# EAGLE board RH002.1 (EAGLE 7.1.0)
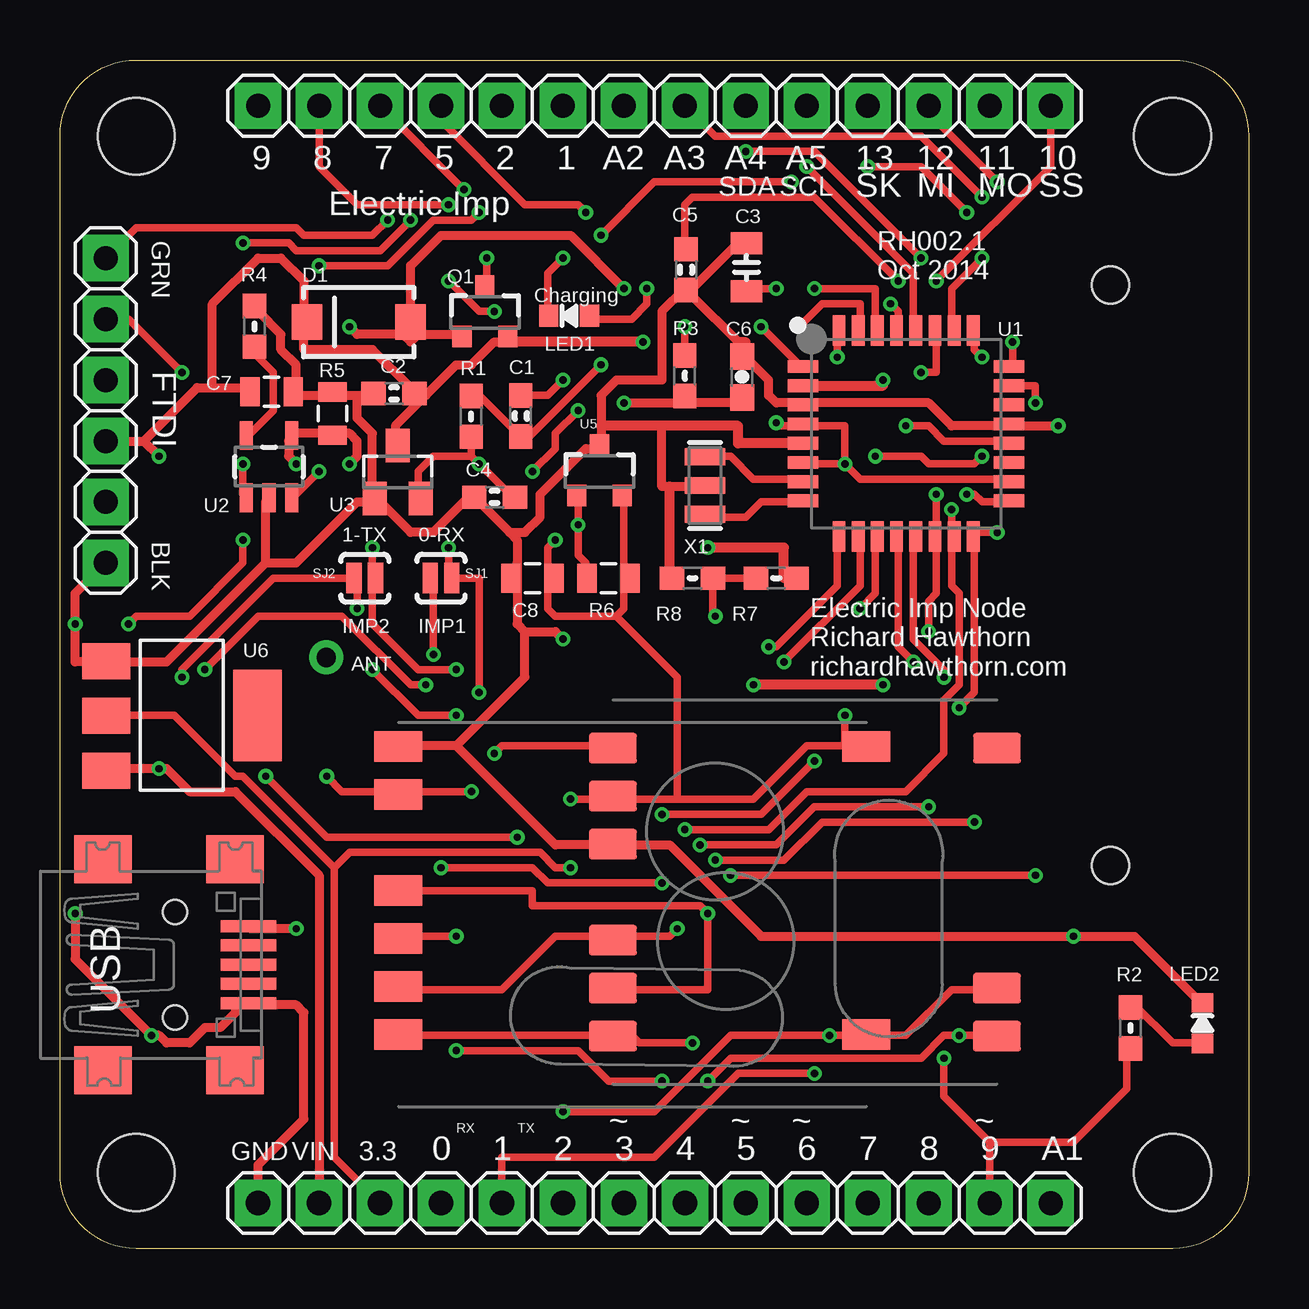
[diagram p0: board, top side]
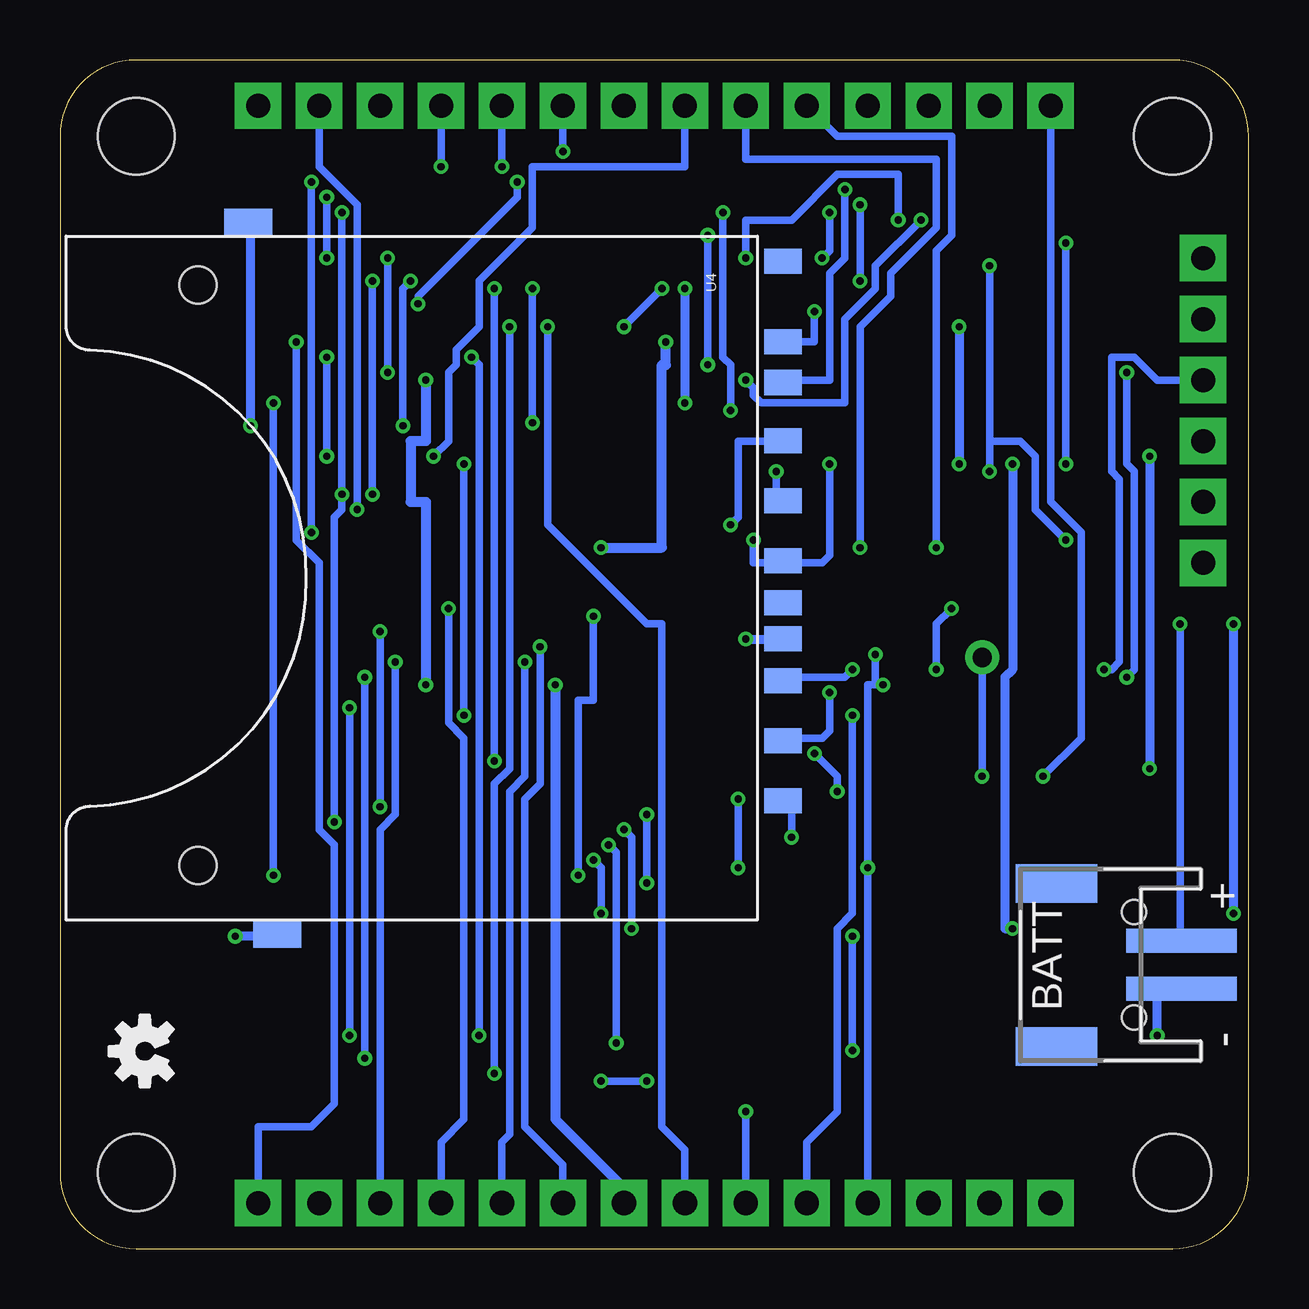
[diagram p1: board, bottom side, seen from below]

Size 49.53 x 49.53 mm. Coordinates in mm from the lower left corner, seen from the top.
Outline: 0,3.17 0,46.35 arc-90 3.17,49.53 46.35,49.53 arc-90 49.53,46.35 49.53,3.17 arc-90 46.35,0 3.17,0 arc-90 0,3.17
Copper layers (1*16): Top 0.035mm / dielectric 1.5mm / Bottom 0.035mm
Design rules "ITEADstudio_DRC *": minimum track width 12mil, minimum drill 12mil, track to track 6mil, track to pad 6mil, pad to pad 6mil, via to via 6mil, smd to smd 0mil, copper to edge 10mil, drill to drill 10mil, minimum pad ring 10mil, minimum via ring 6mil, stop-mask expansion 2mil, vias tented up to drill 100mil, thermal gap 15mil
Net classes: 1 power: width 0.381 mm, clearance 0.254 mm
Holes 3.2 mm at 3.17,3.17 3.17,46.35 46.35,46.35 46.35,3.17
tKeepout: area 0,0 to 5.7,5.7; area 43.8,0 to 49.5,5.7; area 43.8,43.8 to 49.5,49.5; area 0,43.8 to 5.7,49.5; area 42.5,13.3 to 49.5,42.5
bKeepout: area 0,43.8 to 5.7,49.5; area 43.8,43.8 to 49.5,49.5; area 43.8,0 to 49.5,5.7; area 0,0 to 5.7,5.7; area 42.5,13.3 to 49.5,42.5
tRestrict: area 24.3,8.9 to 29.1,12.8; area 5.8,16.9 to 6.9,18.5; area 5.2,9.7 to 6.7,10.4
bRestrict: area 27.4,17.7 to 29.2,18.7; area 21.1,13.8 to 22.9,14.9; area 21.6,12.6 to 22.1,13.2; area 20.7,12.6 to 21.2,13.2; area 20.2,12.8 to 20.7,13.5; area 20.1,13.4 to 20.6,14; area 26.5,18.9 to 27.1,19.5; area 26.5,17.9 to 27.1,18.5; area 27.5,19.1 to 28,19.8; area 27.9,18.8 to 29.1,19.6

## Footprints (pad centres in the part's own frame; a part is rotated, then mirrored left to right if it is on the bottom)
0603-CAP = smd 1.016 x 0.965: 1 -0.85,0; 2 0.85,0
0805-CAP = smd 0.902 x 1.3: 1 -1,0; 2 1,0
0603-CAP' = smd 1.1 x 1: 1 -0.85,0; 2 0.85,0
0805 = smd 0.8 x 1.2: 1 -0.9,0; 2 0.9,0
USB-MINIB = smd 0.5 x 2.308: D+ 0,4.064; D- -0.8,4.064; GND 1.6,4.064; ID 0.8,4.064; VBUS -1.6,4.064 | smd 2 x 2.4: GND1 -4.4,-2; GND2 -4.4,3.5; GND3 4.4,3.5; GND4 4.4,-2 | hole 1: -2.2,1; 2.2,1
JST-PH-2-SMT-RA = smd 1 x 4.6: 1 1,-3.7; 2 -1,-3.7 | smd 1.6 x 3.4: NC1 -3.4,1.5; NC2 3.4,1.5
1X06 = drill 1 pad 1.93 square: 1 -6.35,0; 2 -3.81,0; 3 -1.27,0; 4 1.27,0; 5 3.81,0; 6 6.35,0
SMA-DIODE = smd 1.27 x 1.47: A -2.15,0; C 2.15,0
1X14 = drill 1 pad 1.93 square: 1 -16.51,0; 2 -13.97,0; 3 -11.43,0 | drill 1.016 pad 1.93 square: 4 -8.89,0; 5 -6.35,0; 6 -3.81,0; 7 -1.27,0; 8 1.27,0; 9 3.81,0; 10 6.35,0; 11 8.89,0; 12 11.43,0; 13 13.97,0; 14 16.51,0
1X08 = drill 1 pad 1.93 square: 1 -8.89,0; 2 -6.35,0; 3 -3.81,0; 4 -1.27,0; 5 1.27,0; 6 3.81,0; 7 6.35,0; 8 8.89,0
0603-LED = smd 0.8 x 0.9: MINUS -0.85,0; PLUS 0.85,0
SOT23-3 = smd 0.8 x 0.9: 1 -0.95,-1; 2 0.95,-1; 3 0,1.1
0603-RES = smd 1.016 x 0.965: 1 -0.85,0; 2 0.85,0
RFM12B-MINPADS = smd 2 x 1.27: ANT 8,-6; GND 8,-2; IRQ -8,4; SCK 8,4; SDI 8,2; SDI1 -8.002,-6.001; SDO -8,6; SEL 8,6; VDD 8,-4
RFM69W-MINPADS = smd 2 x 1.27: ANA 8,-5; DIO0 -11.5,5; GND 8,-7; MISO 8,1; MOSI 8,3; NSS 8,5; SCK 8,-1; VDD -11.5,-7
PAD-JUMPER-2-NO_YES_SILK = smd 0.635 x 1.27: 1 -0.45,0; 2 0.45,0
TQFP32-08 = smd 1.27 x 0.533: 1 -4.293,2.8; 2 -4.293,2; 3 -4.293,1.2; 4 -4.293,0.4; 5 -4.293,-0.4; 6 -4.293,-1.2; 7 -4.293,-2; 8 -4.293,-2.8; 17 4.293,-2.8; 18 4.293,-2; 19 4.293,-1.2; 20 4.293,-0.4; 21 4.293,0.4; 22 4.293,1.2; 23 4.293,2; 24 4.293,2.8 | smd 0.533 x 1.27: 9 -2.8,-4.293; 10 -2,-4.293; 11 -1.2,-4.293; 12 -0.4,-4.293; 13 0.4,-4.293; 14 1.2,-4.293; 15 2,-4.293; 16 2.8,-4.293; 25 2.8,4.293; 26 2,4.293; 27 1.2,4.293; 28 0.4,4.293; 29 -0.4,4.293; 30 -1.2,4.293; 31 -2,4.293; 32 -2.8,4.293
SOT23-5 = smd 0.55 x 1.2: 1 -0.95,-1.3; 2 0,-1.3; 3 0.95,-1.3; 4 0.95,1.3; 5 -0.95,1.3
SOT23 = smd 1 x 1.4: 1 -0.95,-1.1; 2 0.95,-1.1; 3 0,1.1
SD_MMC_SOCKET = smd 1.05 x 1.56: 1 6.77,29.87; 2 4.27,29.87; 3 2.52,29.87; 4 -0.73,29.87; 5 -3.23,29.87; 6 -5.73,29.87; 7 -8.15,29.87; 8 -9.85,29.87; 9 9.27,29.87; CD 1.02,29.87; WP -13.2,29.87 | smd 1.2 x 2: S1 -14.8,7.6; S2 14.8,8.8 | hole 1.55: 11.98,5.5; -12.22,5.5
SOT223 = smd 1.499 x 2.007: 1 -2.261,-3.15; 2 0.025,-3.15; 3 2.311,-3.15 | smd 3.81 x 2.007: 4 0,3.15
RFM12B-ANTENNA = drill 0.8 pad 1.422: P$1 0,0
RESONATOR-SMD = smd 0.7 x 1.7: 1 -1.2,0; 2 0,0; 3 1.2,0

## Placement (x,y rotation side)
C1  0.1  [0603-CAP]  19.2,34.7 90 top
C2  1u  [0603-CAP]  13.92,35.64 180 top
C3  10u  [0805-CAP]  28.6,40.89 90 top
C4  0.1  [0603-CAP]  18.11,31.32 180 top
C5  0.1  [0603-CAP]  26.09,40.79 270 top
C6  4u7  [0603-CAP']  28.42,36.32 90 top
C7  1 uF  [0805]  8.81,35.71 0 top
C8  0.1uF  [0805]  19.68,27.94 180 top
CN1  USB  [USB-MINIB]  3.78,11.84 270 top
CN3  BATT  [JST-PH-2-SMT-RA]  6.5,11.82 90 bottom
CN4  FTDI  [1X06]  1.91,34.92 90 top
D1  SCHOTTKY  [SMA-DIODE]  12.45,38.61 180 top
JP1  [1X06]  14.61,47.62 0 top
JP3  [1X14]  24.77,1.91 180 top
JP5  [1X08]  32.38,47.62 0 top
LED1  LED0603  [0603-LED]  21.21,38.87 0 top
LED2  LED0603  [0603-LED]  47.6,9.4 270 top
Q1  MOSFET  [SOT23-3]  17.7,39.01 0 top
R1  10k  [0603-RES]  17.13,34.68 90 top
R2  1k5  [0603-RES]  44.6,9.19 270 top
R3  1k5  [0603-RES]  26.04,36.37 90 top
R4  2K  [0603-RES]  8.1,38.43 270 top
R5  100 K  [0805]  11.35,34.8 270 top
R6  100k  [0805]  22.86,27.94 0 top
R7  470k  [0603-RES]  29.84,27.94 0 top
R8  470k  [0603-RES]  26.35,27.94 0 top
RF1  RFM12B  [RFM12B-MINPADS]  31.04,14.86 180 top
RF2  RFM69  [RFM69W-MINPADS]  22.1,13.92 180 top
SJ1  JUMPER-PAD-2-NOYES_SILK  [PAD-JUMPER-2-NO_YES_SILK]  15.88,27.94 0 top
SJ2  JUMPER-PAD-2-NOYES_SILK  [PAD-JUMPER-2-NO_YES_SILK]  12.7,27.94 0 top
U1  ATMega-328  [TQFP32-08]  35.26,33.96 0 top
U2  MCP73831  [SOT23-5]  8.71,32.59 0 top
U3  MCP1703CB  [SOT23]  14.07,32.36 0 top
U4  ELECTRIC_IMP  [SD_MMC_SOCKET]  49.28,27.94 270 bottom
U5  ATSHA204-TSU  [SOT23-3]  22.48,32.38 0 top
U6  REG1117  [SOT223]  5.08,22.23 270 top
U$1  RFM12B_ANTENNA  [RFM12B-ANTENNA]  11.1,24.64 0 top
U$3  [OSHW-LOGO-S]  46,8.23 90 bottom
X1  16 MHz  [RESONATOR-SMD]  26.87,31.8 270 top

## Library data of the parts
C1-C5 CN1 LED1 LED2 R1-R4 R7 R8 RF1 RF2 U1 U$1 = LowPowerLab
C6 U2 X1 = SparkFun
C7 = SparkFun-Capacitors
C8 R6 SJ1 SJ2 = SparkFun-Passives
CN3 = adafruit
CN4 JP1 JP3 JP5 = pinhead
D1 Q1 = SparkFun-DiscreteSemi
R5 = SparkFun-Resistors
U3 = linear
U4 = SparkFun-RF
U5 = SparkFun-DigitalIC
U6 = burr-brown; MPN: REG1117; OC_FARNELL: 1097566; OC_NEWARK: 14P6981
U$3 = SparkFun-Aesthetics

## Nets
A0: R7.1 R8.2 U1.23
A1: JP3.1 U1.24
A2: JP5.1 U1.25
A3: JP5.2 U1.26
A4_SDA: JP5.3 U1.27
A5_SCL: JP5.4 U1.28
A6: U1.19
A7: U1.22
AREF: C5.1 U1.20
CD: U4.CD
D0_RX: CN4.4 JP3.11 SJ1.1 U1.30
D1_TX: CN4.5 JP3.10 SJ2.1 U1.31
D2: JP3.9 RF1.IRQ RF2.DIO0 U1.32
D3: JP3.8 U1.1
D4: JP3.7 U1.2
D5: JP3.6 U1.9
D6: JP3.5 U1.10
D7: JP3.4 U1.11
D8: JP3.3 U1.12
D9: JP3.2 R2.2 U1.13
D10_SS: JP5.8 RF1.SEL RF2.NSS U1.14
D11_MOSI: JP5.7 RF1.SDI RF2.MOSI U1.15
D12_MISO: JP5.6 RF1.SDO RF2.MISO U1.16
D13_SCK: JP5.5 RF1.SCK RF2.SCK U1.17
GND [power]: C2.2 C3.2 C4.2 C5.2 C6.2 C7.2 C8.2 CN1.GND CN3.2 CN4.1 JP3.14 LED2.MINUS R4.1 R5.1 R8.1 RF1.GND RF2.GND U1.3 U1.5 U1.21 U2.2 U3.1 U4.3 U4.S1 U4.S2 U5.3 U6.1 X1.2
ID: R6.1 U4.6 U5.1
N$1: U1.7 X1.1
N$2: LED2.PLUS R2.1
N$3: RF1.ANT RF2.ANA U$1.P$1
N$4: LED1.PLUS R3.2
N$20: C1.2 CN4.6
N$21: U1.8 X1.3
PIN1: JP1.6 SJ1.2 U4.1
PIN2: JP1.5 SJ2.2 U4.2
PIN5: JP1.4 U4.5
PIN7: JP1.3 U4.7
PIN8: JP1.2 U4.8
PIN9: JP1.1 U4.9
PROG: R4.2 U2.5
PWR [power]: C2.1 C7.1 CN4.3 D1.C JP3.13 Q1.2 R7.2 U3.3 U6.3
RST: C1.1 R1.2 U1.29
STAT: LED1.MINUS U2.1
VBAT: CN3.1 Q1.3 U2.3
VBUS [power]: C6.1 CN1.VBUS D1.A Q1.1 R3.1 R5.2 U2.4
VCC: C3.1 C4.1 C8.1 JP3.12 R1.1 R6.2 RF1.VDD RF2.VDD U1.4 U1.6 U1.18 U3.2 U4.4 U5.2 U6.2

## Tracks (layer width: path | path; a pad name or v marks a point on that pad's centre or on a via)
A0  (via drill 0.3)
  Top 0.305: R7.1 R8.2 27.2,26.35 v27.3,26.35 | U1.23 40.64,35.96 v40.64,35.24 | v40.64,15.56 v27.94,15.56
  Bottom 0.305: v40.64,35.24 v40.64,15.56 | v27.94,15.56 27.94,22.86 27.3,22.86 v27.3,26.35
A1  (via drill 0.3)
  Top 0.305: v39.69,37.78 39.69,36.83 U1.24
  Bottom 0.305: v39.69,37.78 39.69,29.53 38.73,28.57 38.73,17.46 38.1,16.83 38.1,6.03 39.05,5.08 41.27,5.08 JP3.1
A2  (via drill 0.3)
  Top 0.305: v38.42,37.15 38.1,37.47 38.1,38.1 U1.25 | v38.42,33.02 38.1,32.7 36.2,32.7 35.88,33.02 v33.97,33.02
  Bottom 0.305: v38.42,33.02 v38.42,37.15 | v33.97,33.02 33.34,33.66 33.34,36.51 33.02,36.83 33.02,37.47 32.07,38.42 32.07,40.32 29.84,42.55 29.84,45.09 23.5,45.09 JP5.1
A3  (via drill 0.3)
  Top 0.305: v38.42,41.27 37.15,40.01 37.15,38.42 U1.26 | v38.42,43.81 35.88,46.35 27.3,46.35 JP5.2
  Bottom 0.305: v38.42,43.81 v38.42,41.27
A4_SDA  (via drill 0.3)
  Top 0.305: v35.88,36.51 36.51,36.51 36.51,38.1 U1.27 | v35.88,41.27 31.43,45.72 v28.57,45.72
  Bottom 0.305: v35.88,41.27 v35.88,36.51 | JP5.3 v28.57,45.72
A5_SCL  (via drill 0.3)
  Top 0.305: v31.11,45.09 35.56,40.64 35.56,38.42 U1.28
  Bottom 0.305: JP5.4 v31.11,45.09
AREF  (via drill 0.3)
  Top 0.305: v34.92,40.32 31.43,43.81 26.35,43.81 26.04,43.5 26.04,41.91 C5.1 | v35.24,34.29 36.2,34.29 36.83,33.66 39.37,33.66 U1.20
  Bottom 0.305: v34.92,40.32 35.24,40.01 v35.24,34.29
D0_RX  (via drill 0.3)
  Top 0.305: v15.56,24.77 15.56,27.94 SJ1.1 | v31.43,40.01 33.97,40.01 33.97,38.42 U1.30 | v31.43,20.32 29.21,18.1 v25.08,18.1 | v25.08,15.24 20.32,15.24 19.68,15.88 v15.88,15.88 | v6.03,24.13 8.26,26.35 11.75,26.35 14.61,23.5 v15.24,23.5
  Bottom 0.305: 15.56,23.5 v15.56,24.77 | 15.56,23.5 15.88,23.5 v15.88,15.88 JP3.11 | v31.43,20.32 v31.43,40.01 | v25.08,15.24 v25.08,18.1 | CN4.4 3.81,36.2 4.76,37.15 5.71,37.15 5.71,32.38 5.4,32.07 5.4,24.45 5.71,24.13 v6.03,24.13 | 15.56,23.5 v15.24,23.5
D1_TX  (via drill 0.3)
  Top 0.305: v5.08,23.81 5.08,24.13 8.89,27.94 SJ2.1 12.38,27.94 v12.38,26.67 | v5.08,36.51 2.86,38.73 CN4.5 | v30.8,38.42 31.75,39.37 33.34,39.37 33.34,38.42 U1.31 | v31.43,7.3 28.26,7.3 24.77,3.81 18.41,3.81 JP3.10 | v13.02,24.13 14.92,22.23 v16.51,22.23
  Bottom 0.305: v5.08,23.81 4.76,24.13 4.76,32.38 5.08,32.7 v5.08,36.51 | v30.8,38.42 30.8,20 31.43,19.37 v31.43,7.3 | v12.38,26.67 13.02,26.04 v13.02,24.13 | v16.51,22.23 16.51,13.97 17.14,13.34 17.14,5.71 18.41,4.45 JP3.10
D2  (via drill 0.3)
  Top 0.305: v32.38,37.15 32.38,38.1 U1.32 | RF1.IRQ 38.73,10.79 37.15,10.79 35.24,8.89 33.66,8.89 RF2.DIO0 33.34,8.89 v32.07,8.89 27.94,8.89 24.77,5.71 v20.95,5.71
  Bottom 0.305: v32.38,37.15 32.07,36.83 v32.07,8.89 | v20.95,5.71 JP3.9
D3  (via drill 0.3)
  Top 0.305: v29.21,38.42 30.8,36.83 U1.1
  Bottom 0.305: v29.21,38.42 29.21,30.16 25.08,26.04 24.45,26.04 24.45,5.08 23.5,4.13 JP3.8
D4  (via drill 0.3)
  Top 0.406: U1.2 34.29,35.96 v34.29,36.2 | v34.29,23.5 v28.89,23.5
  Bottom 0.406: v34.29,36.2 34.29,33.66 34.92,33.66 34.92,31.11 34.29,31.11 v34.29,23.5 | v28.89,23.5 28.89,5.4 26.04,2.54 JP3.7
D5  (via drill 0.3)
  Top 0.305: v29.53,25.08 29.84,25.08 32.38,27.62 32.38,29.53 U1.9
  Bottom 0.305: v29.53,25.08 29.53,19.37 30.16,18.73 30.16,5.08 28.57,3.49 JP3.6
D6  (via drill 0.3)
  Top 0.305: v30.16,24.45 33.34,27.62 33.34,29.53 U1.10
  Bottom 0.305: v30.16,24.45 30.16,19.68 30.8,19.05 30.8,4.76 31.11,4.45 JP3.5
D7  (via drill 0.3)
  Top 0.305: v33.34,26.67 33.97,27.3 33.97,29.53 U1.11
  Bottom 0.305: v33.34,26.67 33.34,21.91 32.7,21.27 32.7,5.4 33.66,4.45 JP3.4
D8  (via drill 0.3)
  Top 0.305: v35.56,24.45 34.92,25.08 34.92,29.53 U1.12
  Bottom 0.305: v35.56,24.45 35.56,18.1 36.2,17.46 JP3.3
D9  (via drill 0.3)
  Top 0.305: 38.73,4.45 42.23,4.45 44.45,6.67 44.45,8.26 R2.2 | JP3.2 38.73,4.45 | v36.83,23.81 36.83,24.13 35.56,25.4 35.56,29.53 U1.13 | v36.83,7.94 36.83,6.35 38.73,4.45
  Bottom 0.305: v36.83,7.94 v36.83,23.81
D10_SS  (via drill 0.3)
  Top 0.305: RF2.NSS 14.29,8.89 22.86,8.89 RF1.SEL 23.18,8.89 23.81,8.89 24.13,8.57 v26.35,8.57 | v36.51,31.43 36.51,29.84 U1.14 36.51,29.53 36.51,27.3 36.2,26.99 v36.2,25.72 | v36.51,40.32 41.27,45.09 JP5.8 | v26.67,16.83 29.84,16.83 31.43,18.41 v36.2,18.41
  Bottom 0.305: v36.51,40.32 v36.51,31.43 | v26.35,8.57 26.35,16.51 v26.67,16.83 | v36.2,25.72 v36.2,18.41
D11_MOSI  (via drill 0.3)
  Top 0.305: RF2.MOSI 14.29,10.79 18.41,10.79 20.64,13.02 22.86,13.02 RF1.SDI 23.18,13.02 25.4,13.02 v25.72,13.34 | v37.15,30.8 37.15,29.84 U1.15 37.15,29.53 37.15,27.62 37.47,27.3 37.47,23.5 36.83,22.86 36.83,20.64 35.24,19.05 31.11,19.05 29.53,17.46 v26.04,17.46
  Bottom 0.305: v37.15,30.8 37.15,43.5 38.73,45.09 JP5.7 | v25.72,13.34 25.72,17.14 v26.04,17.46
D12_MISO  (via drill 0.3)
  Top 0.305: v39.05,29.84 38.1,29.84 U1.16 38.1,29.53 38.1,23.18 v37.47,22.54 | v39.05,44.45 36.2,47.31 JP5.6 | v16.51,13.02 14.29,13.02 RF2.MISO | v16.51,8.26 21.59,8.26 22.86,6.99 v25.08,6.99 | v26.99,6.99 27.94,7.94 35.88,7.94 36.83,8.89 v37.47,8.89 38.73,8.89 RF1.SDO
  Bottom 0.305: v39.05,44.45 v39.05,29.84 | v16.51,8.26 v16.51,13.02 | v26.99,6.99 v25.08,6.99 | v37.47,8.89 v37.47,22.54
D13_SCK  (via drill 0.3)
  Top 0.305: RF2.SCK 14.29,14.92 19.68,14.92 19.68,14.29 26.67,14.29 v26.99,13.97 26.99,10.79 22.86,10.79 RF1.SCK | v37.78,31.43 38.1,31.43 38.42,31.11 39.37,31.11 U1.17 | v37.78,43.18 35.88,45.09 v33.66,45.09 | v27.3,16.19 30.16,16.19 31.75,17.78 v38.1,17.78
  Bottom 0.305: v37.78,43.18 v37.78,31.43 37.78,30.8 38.1,30.48 v38.1,17.78 | JP5.5 v33.66,45.09 | v26.99,13.97 26.99,15.88 v27.3,16.19
GND  (via drill 0.3)
  Top 0.381: JP3.14 8.26,3.49 10.16,5.4 10.16,9.84 9.84,10.16 7.94,10.16 CN1.GND 7.62,10.16 7.3,10.16 7.3,9.84 6.67,9.21 6.03,9.21 5.4,8.57 4.45,8.57 4.13,8.89 v3.81,8.89 0.64,12.06 v0.64,13.97 | 12.38,35.56 11.43,35.56 R5.1 11.11,35.56 9.84,35.56 C7.2 9.84,35.88 9.84,36.83 9.21,37.47 9.21,38.1 8.26,39.05 R4.1 | 12.38,35.56 13.02,35.56 C2.2 | 8.57,28.57 8.57,31.11 U2.2 | 8.57,28.57 4.45,24.45 2.22,24.45 U6.1 1.91,24.45 0.64,24.45 v0.64,26.04 0.64,27.3 CN4.1 | 8.57,28.57 9.84,28.57 12.38,31.11 13.02,31.11 U3.1 | 12.38,35.56 12.38,34.61 13.02,33.97 13.02,31.43 U3.1 | 22.54,33.66 22.54,33.34 U5.3 | 25.08,34.29 25.08,31.75 25.4,31.75 26.67,31.75 X1.2 | C5.2 26.35,39.69 28.26,37.78 28.57,37.78 28.57,37.47 C6.2 28.57,37.15 29.53,36.2 29.53,35.56 29.84,35.24 30.8,35.24 U1.3 31.11,35.24 36.2,35.24 37.15,34.29 39.37,34.29 U1.21 39.69,34.29 v41.59,34.29 | C3.2 28.57,41.91 28.26,41.91 26.35,40.01 C5.2 | 22.54,33.66 22.54,34.29 22.54,35.56 23.18,36.2 25.08,36.2 25.08,39.05 26.04,40.01 C5.2 | 22.54,33.66 U5.3 | LED2.MINUS 47.31,10.48 44.77,13.02 v42.23,13.02 29.21,13.02 25.4,16.83 23.18,16.83 RF1.GND 22.86,16.83 20.64,16.83 16.51,20.95 | 19.05,28.57 19.05,29.53 18.73,29.84 | 18.73,29.84 17.46,31.11 C4.2 17.14,31.43 15.56,29.84 14.61,29.84 13.34,31.11 U3.1 | v20.95,25.4 20.64,25.72 19.37,25.72 | 19.37,25.72 19.05,26.04 19.05,28.57 | 19.05,28.57 C8.2 | 16.51,20.95 14.29,20.95 RF2.GND | 19.37,25.72 19.37,23.81 16.51,20.95 | 18.73,29.84 19.37,29.84 20,30.48 20,31.43 21.91,33.34 22.23,33.34 U5.3
  Top 0.406: U1.5 28.26,33.56 28.26,34.29 25.08,34.29 22.54,34.29 | R8.1 25.4,27.94 25.4,31.75
  Bottom 0.381: v3.81,8.89 3.81,10.79 2.86,10.79 CN3.2 | v0.64,26.04 v0.64,13.97 | v41.59,34.29 41.59,42.55 U4.S1 | v42.23,13.02 40.64,13.02 U4.S2 | v20.95,25.4 19.68,25.4 U4.3
ID  (via drill 0.3)
  Top 0.305: R6.1 21.91,28.57 21.59,28.89 v21.59,30.16 21.59,31.11 U5.1
  Bottom 0.305: v21.59,30.16 21.27,30.48 21.27,33.66 19.68,33.66 U4.6
N$1
  Top 0.305: U1.7 30.8,32.07 28.89,32.07 27.94,33.02 26.99,33.02 X1.1
N$2
  Top 0.305: LED2.PLUS 47.31,8.57 46.35,8.57 44.77,10.16 R2.1
N$3  (via drill 0.3)
  Top 0.305: v11.11,19.68 11.75,19.05 13.97,19.05 RF2.ANA 14.29,19.05 v17.14,19.05 | v18.1,20.64 18.41,20.95 22.86,20.95 RF1.ANT
  Bottom 0.305: v11.11,19.68 11.11,24.45 U$1.P$1 | v18.1,20.64 17.14,19.68 v17.14,19.05
N$4  (via drill 0.3)
  Top 0.305: v24.45,40.01 24.45,39.37 23.81,38.73 22.23,38.73 LED1.PLUS | R3.2 v26.04,38.42
  Bottom 0.305: v26.04,38.42 v24.45,40.01
N$20  (via drill 0.3)
  Top 0.305: v20.95,36.2 20.32,35.56 19.37,35.56 C1.2 | v13.65,42.86 13.02,42.23 10.16,42.23 9.84,42.55 3.17,42.55 CN4.6
  Bottom 0.305: v20.95,36.2 20.64,35.88 20.64,35.56 20.32,35.24 16.83,35.24 16.83,38.73 15.56,40.01 15.56,40.96 v13.65,42.86
N$21
  Top 0.305: U1.8 30.8,31.11 29.21,31.11 28.57,30.48 26.99,30.48 X1.3
PIN1  (via drill 0.3)
  Top 0.305: v17.46,23.18 17.46,27.94 SJ1.2 16.19,27.94 v16.19,29.21
  Bottom 0.305: v17.46,23.18 17.46,21.59 17.78,21.27 19.37,21.27 U4.1 | JP1.6 20.95,45.4 13.02,45.4 13.02,42.55 14.92,40.64 14.92,39.69 16.19,38.42 v16.19,29.21
PIN2  (via drill 0.3)
  Top 0.305: 13.02,27.94 13.02,26.04 14.92,24.13 v16.51,24.13 | 13.02,27.94 v13.02,29.21 | 13.02,27.94 SJ2.2
  Bottom 0.305: v16.51,24.13 16.83,23.81 19.37,23.81 U4.2 | JP1.5 17.14,46.35 12.38,46.35 12.38,42.23 13.02,41.59 v13.02,29.21
PIN5  (via drill 0.3)
  Top 0.305: v19.68,32.38 20.64,33.34 20.64,33.97 v21.59,34.92 | v21.91,43.18 21.59,43.5 19.37,43.5 15.88,46.99 JP1.4
  Bottom 0.305: v19.68,32.38 19.68,31.43 U4.5 | v21.59,34.92 21.59,36.83 21.91,37.15 v21.91,43.18
PIN7  (via drill 0.3)
  Top 0.305: JP1.3 v16.83,44.13
  Bottom 0.305: v16.83,44.13 16.83,41.27 17.46,40.64 17.46,36.2 19.37,36.2 U4.7
PIN8  (via drill 0.3)
  Top 0.305: v18.1,39.05 17.46,39.05 v16.19,40.32 | v16.19,43.5 12.38,43.5 10.79,45.09 JP1.2
  Bottom 0.305: v18.1,39.05 18.1,37.78 19.37,37.78 U4.8 | v16.19,43.5 v16.19,40.32
PIN9  (via drill 0.3)
  Top 0.305: v19.05,17.14 11.11,17.14 v8.57,19.68
  Bottom 0.305: v19.05,17.14 19.05,18.73 19.37,18.73 U4.9 | v8.57,19.68 6.99,21.27 6.99,29.84 8.26,31.11 JP1.1
PROG
  Top 0.305: R4.2 8.26,37.47 8.26,37.15 8.89,36.51 8.89,34.92 7.94,33.97 U2.5
PWR  (via drill 0.3)
  Top 0.381: 15.24,35.56 16.51,36.83 17.14,36.83 18.1,37.78 18.41,37.78 Q1.2 | 15.24,35.56 14.92,35.56 C2.1 | 15.24,35.56 13.97,34.29 13.97,33.66 U3.3 | 15.24,35.56 C2.1 | C2.1 14.61,35.88 13.02,37.47 10.16,37.47 10.16,38.42 D1.C 10.16,38.73 10.16,40.32 9.21,41.27 8.26,41.27 6.35,39.37 6.35,35.88 | 6.35,35.88 5.71,35.88 3.49,33.66 | 6.35,35.88 7.62,35.88 C7.1 | CN4.3 3.49,33.66 | 3.49,33.66 v4.13,33.02 | U6.3 2.22,20 v4.13,20 4.45,20 5.4,19.05 7.3,19.05 10.79,15.56 JP3.13
  Top 0.406: R7.2 30.16,27.94 30.16,29.21 v26.99,29.21 | v24.29,37.78 18.65,37.78 Q1.2
  Bottom 0.381: v4.13,33.02 v4.13,20
  Bottom 0.406: v26.99,29.21 24.45,29.21 24.45,36.83 24.29,36.83 v24.29,37.78
RST  (via drill 0.3)
  Top 0.305: R1.2 17.46,35.56 19.05,33.97 C1.1 19.37,33.66 v22.54,36.83 | v34.61,39.37 34.92,39.05 34.92,38.42 U1.29 | v30.48,44.45 24.77,44.45 v22.54,42.23
  Bottom 0.305: v34.61,39.37 34.61,39.69 30.48,43.81 v30.48,44.45 | v22.54,36.83 v22.54,42.23
STAT  (via drill 0.3)
  Top 0.305: v20.95,41.27 20.32,40.64 20.32,38.73 LED1.MINUS | v14.61,42.86 13.34,41.59 9.84,41.59 9.53,41.91 v7.62,41.91 | v7.62,32.7 7.62,31.43 U2.1
  Bottom 0.305: v20.95,41.27 20.95,42.86 19.05,42.86 17.14,44.77 14.61,44.77 v14.61,42.86 | v7.62,32.7 v7.62,41.91
VBAT  (via drill 0.3)
  Top 0.305: v17.78,41.27 17.78,40.32 Q1.3 | v17.46,43.18 17.14,42.86 15.56,42.86 13.65,40.96 v10.79,40.96 | v10.79,32.38 9.84,31.43 U2.3 | v2.86,26.04 3.17,26.35 5.4,26.35 7.62,28.57 v7.62,29.53
  Bottom 0.305: v17.78,41.27 17.46,41.59 v17.46,43.18 | v10.79,32.38 10.79,33.66 | 10.79,33.66 v10.79,40.96 | v2.86,26.04 2.86,13.02 CN3.1 | v7.62,29.53 8.89,30.8 8.89,33.02 9.53,33.66 10.79,33.66
VBUS  (via drill 0.3)
  Top 0.381: 26.04,35.24 28.26,35.24 C6.1 | 14.92,38.1 14.61,38.1 14.29,38.42 D1.A | 14.92,38.1 16.51,38.1 Q1.1 | v12.06,32.7 12.38,33.02 12.38,33.66 12.06,33.97 11.43,33.97 R5.2 11.11,33.97 9.84,33.97 U2.4 9.53,33.66 9.53,33.02 v9.84,32.7 | v12.06,38.42 12.38,38.1 14.29,38.1 14.61,37.78 14.92,38.1 | 14.92,38.1 D1.A | v23.5,35.24 26.04,35.24 | v23.5,40.01 21.27,42.23 15.88,42.23 14.61,40.96 14.61,38.73 D1.A | 26.04,35.24 R3.1 | v9.84,13.34 7.94,13.34 CN1.VBUS
  Bottom 0.381: v12.06,38.42 v12.06,32.7 | v23.5,40.01 v23.5,35.24 | v9.84,13.34 10.16,13.34 10.16,23.81 9.84,24.13 v9.84,32.7
VCC  (via drill 0.3)
  Top 0.305: 11.43,15.88 7.62,19.68 7.3,19.68 4.76,22.23 2.22,22.23 U6.2 | 11.43,15.88 11.43,3.81 JP3.12 | v32.7,32.7 31.11,32.7 U1.6 | v32.7,32.7 32.7,34.29 31.11,34.29 U1.4 30.8,34.29 29.84,34.29 v29.84,34.42 | v32.7,32.7 33.34,32.07 39.37,32.07 U1.18 | v29.84,40.01 28.89,40.01 C3.1 | 25.72,18.73 28.89,18.73 31.11,20.95 32.7,20.95 | 25.72,18.73 23.18,18.73 RF1.VDD 22.86,18.73 v21.27,18.73 | 32.7,20.95 33.34,20.95 RF2.VDD 32.7,20.95 | 17.14,33.02 17.14,33.66 R1.1 | C4.1 18.73,31.43 v17.46,32.7 17.14,33.02 | 17.14,33.02 15.56,33.02 14.92,32.38 14.92,31.43 U3.2 | 20.32,28.57 20.32,26.67 20.64,26.35 23.18,26.35 | 23.18,26.35 23.5,26.67 23.5,28.57 | 23.5,28.57 23.5,31.11 U5.2 | 23.5,28.57 R6.2 | v20.64,29.53 20.32,29.21 20.32,28.57 | 20.32,28.57 C8.1 | 25.72,18.73 25.72,23.81 23.18,26.35 | 32.7,20.95 v32.7,22.23 | 11.43,15.88 12.06,16.51 20,16.51 20.64,15.88 v21.27,15.88
  Bottom 0.305: v29.84,34.42 v29.84,40.01 | v20.64,29.53 20.64,28.57 19.68,28.57 U4.4 19.37,28.57 17.78,28.57 17.46,28.89 v17.46,32.7 | v32.7,22.23 v32.7,32.7 | v21.27,18.73 v21.27,15.88

## Text on the board
tNames: 9 | 8 | 7 | 5 | 2 | 1 | A2 | A3 | A4 | A5 | 13 | 12 | 11 | 10 | SDA | SCL | SK | MI | MO | SS | Electric Imp | GRN | RH002.1 / Oct 2014 | Charging | FTDI | BLK | 1-TX | 0-RX | IMP2 | IMP1 | ANT | Electric Imp Node / Richard Hawthorn / richardhawthorn.com | RX | TX | ~ | ~ | ~ | ~ | GND | VIN | 3.3 | 0 | 1 | 2 | 3 | 4 | 5 | 6 | 7 | 8 | 9 | A1
tDocu: REG